# Altium PCB OksLab_CanToUsb_HW01.PcbDoc (part 2 of 2)
Units mm, origin at the board's own origin, x right, y up, seen from the top; angles counter-clockwise.
Board outline 66.93 x 34.29 mm, 2 copper layers (Top Layer, Bottom Layer), stack 1.57 mm thick; 51 components, 41 nets, 199 pads, 83 vias.
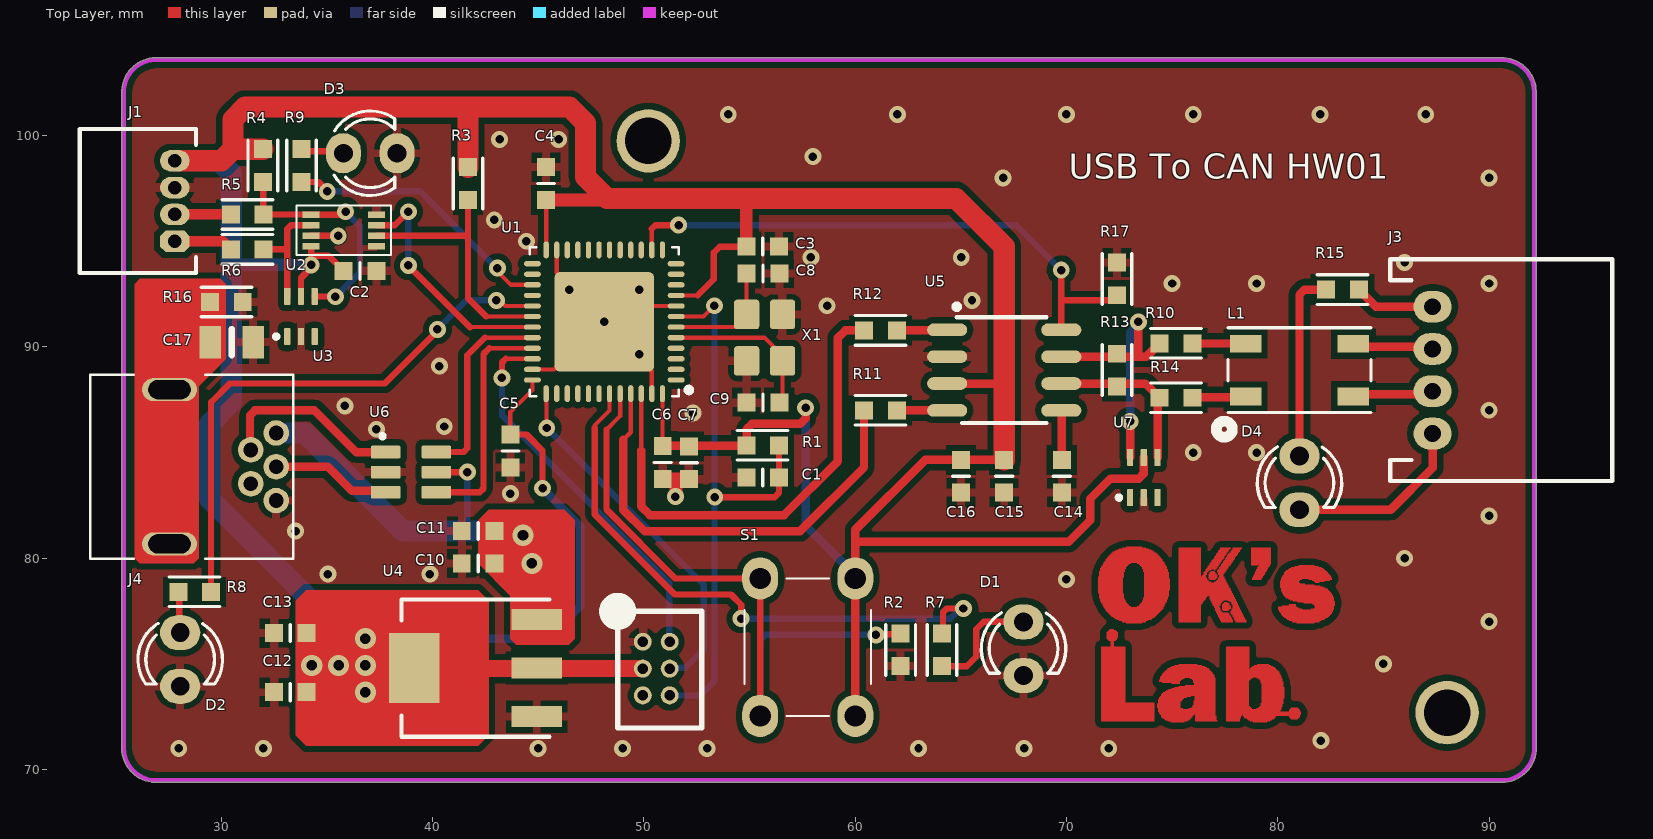
[diagram p0: Top Layer view]

## Via types
v1: diameter 0.8, hole 0.4, Top Layer to Bottom Layer, tented both sides, 76 vias
v2: diameter 1, hole 0.5, Top Layer to Bottom Layer, tented both sides, 7 vias

## Nets (pads, with @x,y where several pads share a name; then routed paths per layer and width w, separated by ;. In a path a pad name is that pad's centre, name@x,y a point inside that pad or via, vN(x,y) a via of type N, cw(c..) or ccw(c..) an arc to the next point about the centre after c; other vN are vias at no path point) (continued)
NetR4_1: (continued)
  Top Layer w0.3: R4.1 31.998,97.783 31.998,96.285 R5.1 U2.5@34.264,96.266 ; U2.5 35.616,96.254 35.755,96.393 v1(35.89,96.393) ; U3.4 34.432,92.381 35.404,92.381 v1(35.413,92.373)
  Bottom Layer w0.3: v1(35.413,92.373) 36.576,93.536 36.576,95.707 v1(35.89,96.393)
NetR6_1: R6.1 U2.6 U3.6 | length 5.6
  Top Layer w0.3: R6.1 33.02,94.615 33.132,94.503 ; U3.6 33.132,94.503 ; U2.6 33.308,95.754 33.132,95.578 33.132,94.503
NetR10_1: R10.1 R13.2 U5.7 U7.6 | length 13.1
  Top Layer w0.4: U5.7 73.406,89.535 ; U7.6 v1(73.01,86.472) ; v1(73.406,91.186) 73.406,89.535 ; R10.1 73.774,89.535 73.406,89.535
  Bottom Layer w0.4: v1(73.01,86.472) 73.01,90.682 73.406,91.078 v1(73.406,91.186)
NetR11_2: R11.2 U5.4 | length 2.4
  Top Layer w0.4: R11.2@61.978,87.004 R11.2 61.973,86.996 U5.4 U5.4 U5.4@64.35,86.989
NetR12_2: R12.2 U5.1 | length 2.4
  Top Layer w0.4: R12.2 61.983,90.793 64.344,90.793 U5.1
NetR13_1: R13.1 R14.1 U5.6 U7.4 | length 7.7
  Top Layer w0.4: U5.6 73.737,88.265 74.31,87.692 U7.4
NRST: C1.1 pad.4@51.226,73.509 R1.1 U1.7 | length 27.8
  Top Layer w0.2: U1.7 52.828,91.436 v1(53.34,91.948)
  Top Layer w0.3: v1(53.36,82.893) 56.197,82.893 56.401,83.096 C1.1@56.401,84.074 ; C1.1@56.401,84.023 R1.1@56.401,85.496
  Bottom Layer w0.3: pad.4@51.226,73.509 52.681,73.509 53.35,74.178 53.35,82.821 53.36,82.831 53.35,82.841 53.35,91.938 v1(53.34,91.948)
SWCLK: pad.4@51.226,74.779 U1.37 | length 17.3
  Top Layer w0.2: U1.37 45.393,87.776 45.393,86.179 v1(45.411,86.161)
  Bottom Layer w0.3: v1(45.411,86.161) 52.832,78.74 52.832,75.692 51.966,74.826 pad.4@51.099,74.826
SWDIO: pad.6 U1.34 | length 18
  Top Layer w0.2: 43.466,89.436 U1.34
  Top Layer w0.3: v1(43.29,88.536) 43.29,89.26 43.466,89.436
  Bottom Layer w0.3: v1(43.29,88.536) 43.29,86.758 44.173,85.875 51.213,78.835 pad.6@51.213,76.026
UARTMODE: R9.1 U1.27 | length 13
  Top Layer w0.2: v1(43.078,93.726) 43.078,93.574 43.716,92.936 U1.27
  Top Layer w0.3: R9.1 34.608,97.802 35.027,97.384 v1(35.027,97.358)
  Bottom Layer w0.3: v1(35.027,97.358) 39.421,97.358 39.827,96.952 43.053,93.726 v1(43.078,93.726)
USB_DM: U1.32 U6.6 | length 9.4
  Top Layer w0.2: 42.485,90.436 U1.32
  Top Layer w0.3: U6.6 41.48,85.024 41.656,85.2 41.656,89.607 42.485,90.436
USB_DP: U1.33 U6.4 | length 11.1
  Top Layer w0.2: 42.692,89.936 U1.33
  Top Layer w0.3: U6.4 42.242,83.124 42.418,83.3 42.418,89.662 42.692,89.936
USBMODE: R8.1 U1.29 | length 26.3
  Top Layer w0.2: v1(43.028,92.202) 43.179,92.202 43.445,91.936 U1.29
  Top Layer w0.3: R8.1 29.528,87.389 30.404,88.265 37.744,88.265 40.234,90.754 v1(40.234,90.83)
  Bottom Layer w0.3: v1(40.234,90.83) 41.605,92.202 v1(43.028,92.202)
pads on no net: J4.4 U1.1 U1.2 U1.3 U1.4 U1.10 U1.11 U1.12 U1.13 U1.15 U1.16 U1.17 U1.18 U1.19 U1.20 U1.21 U1.22 U1.25 U1.26 U1.28 U1.38 U1.39 U1.40 U1.41 U1.42 U2.0 U3.1 U3.3 U7.1 U7.3

## Polygon pours and split planes (outlines as drawn)
GND on Bottom Layer "BOTTOM_GND" (solid, remove dead copper, pour order 1): 26.976,69.394 cw(c26.937,71.031) 25.3,70.991 cw(c25.4,70.993) 25.3,70.993 25.3,102.005 cw(c26.937,102.044) 26.896,103.682 cw(c26.899,103.581) 26.899,103.682 90.574,103.682 cw(c90.589,102.044) 90.604,103.682 90.678,103.682 cw(c90.678,103.581) 90.707,103.677 cw(c90.589,102.044) 92.226,102.085 cw(c92.126,102.082) 92.226,102.082 92.226,71.07 cw(c90.589,71.031) 92.227,71.031 cw(c90.589,71.031) 90.63,69.394 cw(c90.627,69.494) 90.627,69.394 26.976,69.394 ccw(c26.937,71.031)
GND on Top Layer "TOP_GND" (solid, remove dead copper, pour order 0): 26.976,69.394 cw(c26.937,71.031) 25.3,70.991 cw(c25.4,70.993) 25.3,70.993 25.3,102.005 cw(c26.937,102.044) 26.896,103.682 cw(c26.899,103.581) 26.899,103.682 90.574,103.682 cw(c90.589,102.044) 90.604,103.682 90.678,103.682 cw(c90.678,103.581) 90.707,103.677 cw(c90.589,102.044) 92.226,102.085 cw(c92.126,102.082) 92.226,102.082 92.226,71.07 cw(c90.589,71.031) 92.227,71.031 cw(c90.589,71.031) 90.63,69.394 cw(c90.627,69.494) 90.627,69.394 26.976,69.394 ccw(c26.937,71.031)

## Keep-outs
Keep-Out Layer:
  lines w0.2: 90.551,103.581 cw(c90.589,102.044) 92.126,102.082 92.126,71.069 cw(c90.589,71.031) 90.627,69.494 26.975,69.494 cw(c26.937,71.031) 25.4,70.993 25.4,102.006 cw(c26.937,102.044) 26.899,103.581 90.678,103.581

## Other copper
Top Layer:
  region: 77.617,77.861 77.714,77.861 77.714,77.812 77.714,77.763 77.763,77.763 77.763,77.714 77.763,77.665 77.763,77.617 77.714,77.617 77.714,77.568 77.665,77.568 77.665,77.519 77.421,77.519 77.421,77.568 77.372,77.568 77.372,77.617 77.372,77.665 77.372,77.714 77.372,77.763 77.372,77.812 77.421,77.812 77.421,77.861 77.47,77.861 77.47,77.91 77.617,77.91
  region: 76.982,79.326 77.03,79.326 77.03,79.277 77.079,79.277 77.079,79.228 77.128,79.228 77.128,79.18 77.128,79.131 77.128,79.082 77.079,79.082 77.079,79.033 77.03,79.033 77.03,78.984 76.786,78.984 76.786,79.033 76.737,79.033 76.737,79.082 76.737,79.131 76.737,79.18 76.737,79.228 76.737,79.277 76.786,79.277 76.786,79.326 76.835,79.326 76.835,79.375 76.982,79.375
  region: 228 vertices and 1 holes, not listed, extent 71.511,76.933 74.881,80.547
  region: 238 vertices and 1 holes, not listed, extent 77.568,72.243 81.085,75.809
  region: 520 vertices and 0 holes, not listed, extent 75.321,76.982 78.496,80.498
  region: 207 vertices and 1 holes, not listed, extent 74.295,72.243 77.128,74.979
  region: 196 vertices and 0 holes, not listed, extent 71.657,72.292 74.148,76.64
  region: 225 vertices and 0 holes, not listed, extent 80.01,76.933 82.697,79.668
  region: 79.668,80.45 79.668,80.401 79.668,80.352 79.668,80.303 79.668,80.254 79.668,80.205 79.668,80.157 79.668,80.108 79.668,80.059 79.668,80.01 79.668,79.961 79.668,79.912 79.668,79.863 79.668,79.815 79.668,79.766 79.668,79.717 79.619,79.717 79.619,79.668 79.619,79.619 79.57,79.619 79.57,79.57 79.522,79.57 79.522,79.522 79.522,79.473 79.473,79.473 79.473,79.424 79.473,79.375 79.424,79.375 79.424,79.326 79.375,79.326 79.375,79.277 79.375,79.228 79.326,79.228 79.326,79.18 79.277,79.18 79.277,79.131 79.277,79.082 79.228,79.082 79.228,79.033 79.228,78.984 78.789,78.984 78.789,79.033 78.789,79.082 78.838,79.082 78.838,79.131 78.838,79.18 78.887,79.18 78.887,79.228 78.887,79.277 78.935,79.277 78.935,79.326 78.935,79.375 78.984,79.375 78.984,79.424 78.984,79.473 79.033,79.473 79.033,79.522 79.033,79.57 79.082,79.57 79.082,79.619 79.131,79.619 79.131,79.668 78.74,79.668 78.74,79.717 78.74,79.766 78.74,79.815 78.74,79.863 78.74,79.912 78.74,79.961 78.74,80.01 78.74,80.059 78.74,80.108 78.74,80.157 78.74,80.205 78.74,80.254 78.74,80.303 78.74,80.352 78.74,80.401 78.74,80.45 78.74,80.498 79.668,80.498
  region net NetC17_1: 29.972,93.218 30.226,92.964 30.226,89.408 28.956,88.138 28.956,80.01 28.702,79.756 26.162,79.756 25.908,80.01 25.908,92.964 26.162,93.218
  region net +VBUS: 42.672,82.296 42.164,81.788 42.164,79.756 43.688,78.232 43.688,76.2 43.976,75.912 46.448,75.912 46.736,76.2 46.736,81.788 46.228,82.296
  region net +3V3: 33.528,77.978 34.036,78.486 42.164,78.486 42.672,77.978 42.672,71.628 42.164,71.12 34.036,71.12 33.528,71.628
Bottom Layer:
  region net +3V3: 33.528,77.978 34.036,78.486 42.164,78.486 42.672,77.978 42.672,71.628 42.164,71.12 34.036,71.12 33.528,71.628

## Silkscreen, mask and mechanical layers (free items; w line width, h text height)
Top Overlay:
  circle w0.8: c48.768,77.487 r0.48
  lines w0.254: 48.768,71.969 52.739,71.969 52.739,77.487 48.768,77.487 48.768,71.969
  text "USB To CAN HW01" at 70.104,97.56 h2
Mechanical 1:
  lines w0.2: 90.551,103.581 cw(c90.589,102.044) 92.126,102.082 92.126,71.069 cw(c90.589,71.031) 90.627,69.494 26.975,69.494 cw(c26.937,71.031) 25.4,70.993 25.4,102.006 cw(c26.937,102.044) 26.899,103.581 90.678,103.581